# EAGLE board Ardiboard (EAGLE 6.6.0)

No outline drawn. Coordinates in mm, seen from the top.
Copper layers (1*16): Top 0.035mm / dielectric 1.5mm / Bottom 0.035mm
Design rules "default": minimum track width 10mil, minimum drill 24mil, track to track 8mil, track to pad 8mil, pad to pad 8mil, via to via 8mil, smd to smd 8mil, copper to edge 40mil, drill to drill 8mil, minimum pad ring 10mil, minimum via ring 8mil, stop-mask expansion 4mil, vias tented up to drill 0mil, thermal gap 10mil

## Footprints (pad centres in the part's own frame; a part is rotated, then mirrored left to right if it is on the bottom)
C025-025X050 = drill 0.813 octagon: 1 -1.27,0; 2 1.27,0
C025-030X050 = drill 0.813 octagon: 1 -1.27,0; 2 1.27,0
DIL28-3 = drill 0.813 long: 1 -16.51,-3.81; 2 -13.97,-3.81; 3 -11.43,-3.81; 4 -8.89,-3.81; 5 -6.35,-3.81; 6 -3.81,-3.81; 7 -1.27,-3.81; 8 1.27,-3.81; 9 3.81,-3.81; 10 6.35,-3.81; 11 8.89,-3.81; 12 11.43,-3.81; 13 13.97,-3.81; 14 16.51,-3.81; 15 16.51,3.81; 16 13.97,3.81; 17 11.43,3.81; 18 8.89,3.81; 19 6.35,3.81; 20 3.81,3.81; 21 1.27,3.81; 22 -1.27,3.81; 23 -3.81,3.81; 24 -6.35,3.81; 25 -8.89,3.81; 26 -11.43,3.81; 27 -13.97,3.81; 28 -16.51,3.81
1X05-3.5MM = drill 1 pad 2.184: 1 7,0; 2 3.5,0; 3 0,0; 4 -3.5,0; 5 -7,0
2X3-SHROUDED = drill 1.016 pad 1.88 octagon: 1 -1.27,2.54; 2 1.27,2.54; 3 -1.27,0; 4 1.27,0; 5 -1.27,-2.54; 6 1.27,-2.54
HC49/S = drill 0.813: 1 -2.413,0; 2 2.413,0
SOT223 = smd 1.219 x 2.235: 1 -2.311,-3.099; 2 0,-3.099; 3 2.311,-3.099 | smd 3.6 x 2.2: 4 0,3.099
ARDUINOR3-BPLACE = drill 1 pad 1.676 octagon: 3V 35.56,2.54; 5V 38.1,2.54; A0 50.8,2.54; A1 53.34,2.54; A2 55.88,2.54; A3 58.42,2.54; A4 60.96,2.54; A5 63.5,2.54; AREF 23.876,50.8; D0 63.5,50.8; D1 60.96,50.8; D2 58.42,50.8; D3 55.88,50.8; D4 53.34,50.8; D5 50.8,50.8; D6 48.26,50.8; D7 45.72,50.8; D8 41.656,50.8; D9 39.116,50.8; D10 36.576,50.8; D11 34.036,50.8; D12 31.496,50.8; D13 28.956,50.8; GND 26.416,50.8; GND1 43.18,2.54; GND2 40.64,2.54; IOREF 30.48,2.54; RESERVED 27.94,2.54; RESET 33.02,2.54; SCL 18.796,50.8; SDA 21.336,50.8; VIN 45.72,2.54

## Placement (x,y rotation side)
C1  [C025-025X050]  40.64,8.89 180 top
C2  [C025-025X050]  40.64,12.7 180 top
C3  10uF  [C025-030X050]  34.29,43.18 90 top
C4  22uF  [C025-030X050]  27.94,43.18 90 top
C5  10uF  [C025-030X050]  49.53,43.18 90 top
C6  22uF  [C025-030X050]  41.91,43.18 90 top
IC1  ATMEGA168-20P  [DIL28-3]  36.83,21.59 0 top
J1  1X5  [1X05-3.5MM]  20.32,36.83 90 top
JP1  [2X3-SHROUDED]  62.23,21.59 180 top
Q1  [HC49/S]  50.8,11.43 180 top
Q2  AZ1086H-5.0  [SOT223]  29.21,34.29 180 top
Q3  AZ1086H-3.3  [SOT223]  38.1,34.29 180 top
U1  ARDUINOR3-BPLACE  [ARDUINOR3-BPLACE]  0,0 0 top

## Library data of the parts
C1-C6 = rcl
IC1 J1 U1 = adafruit
JP1 = SparkFun-Connectors; PROD_ID: CONN-10681
Q1 = adafruit; OC_FARNELL: 1667008; OC_NEWARK: unknown
Q2 Q3 = voltage

## Nets
+5V: C4.1 C5.1 IC1.7 IC1.20 IC1.21 J1.3 JP1.2 Q2.2 Q3.3 U1.5V U1.AREF U1.IOREF
N$1: IC1.23 U1.A0
N$2: IC1.24 U1.A1
N$3: IC1.25 U1.A2
N$4: IC1.26 U1.A3
N$5: IC1.27 U1.SDA
N$6: IC1.28 U1.A5 U1.SCL
N$7: IC1.19 JP1.3 U1.D13
N$8: IC1.4 J1.1 U1.D2
N$9: IC1.18 JP1.1 U1.D12
N$10: IC1.17 JP1.4 U1.D11
N$11: IC1.16 U1.D10
N$12: IC1.15 U1.D9
N$13: IC1.14 U1.D8
N$14: IC1.13 U1.D7
N$15: IC1.12 U1.D6
N$16: IC1.11 U1.D5
N$17: IC1.6 U1.D4
N$18: IC1.5 U1.D3
N$19: IC1.3 J1.2
N$20: C1.1 IC1.10 Q1.2
N$21: IC1.2 U1.D0
N$22: IC1.1 JP1.5 U1.RESET
N$23: C2.1 IC1.9 Q1.1
N$24: C6.1 Q3.2 U1.3V
N$25: C3.1 Q2.3 U1.VIN
PE: C1.2 C2.2 C3.2 C4.2 C5.2 C6.2 IC1.8 IC1.22 J1.5 JP1.6 Q2.1 Q3.1 U1.GND U1.GND1 U1.GND2

## Tracks (layer width: path | path; a pad name or v marks a point on that pad's centre or on a via)
+5V  (11 unrouted)
N$1  (1 unrouted)
N$2  (1 unrouted)
N$3  (1 unrouted)
N$4  (1 unrouted)
N$5  (1 unrouted)
N$6  (2 unrouted)
N$7  (2 unrouted)
N$8  (2 unrouted)
N$9  (2 unrouted)
N$10  (2 unrouted)
N$11  (1 unrouted)
N$12  (1 unrouted)
N$13  (1 unrouted)
N$14  (1 unrouted)
N$15  (1 unrouted)
N$16  (1 unrouted)
N$17  (1 unrouted)
N$18  (1 unrouted)
N$19  (1 unrouted)
N$20  (2 unrouted)
N$21  (1 unrouted)
N$22  (2 unrouted)
N$23  (2 unrouted)
N$24  (2 unrouted)
N$25  (2 unrouted)
PE  (14 unrouted)